# Altium PCB NC1-1B-TESTADAPTER-BASIS.PcbDoc
Units mm, origin at the board's own origin, x right, y up, seen from the top; angles counter-clockwise.
Board outline 100 x 100 mm, 4 copper layers (Top Layer, Mid 1 (GND), Mid 2 (PWR), Bottom Layer), stack 1.586 mm thick; 39 components, 26 nets, 104 pads, 0 vias.
Unrouted connection lines stored in the file: 51.
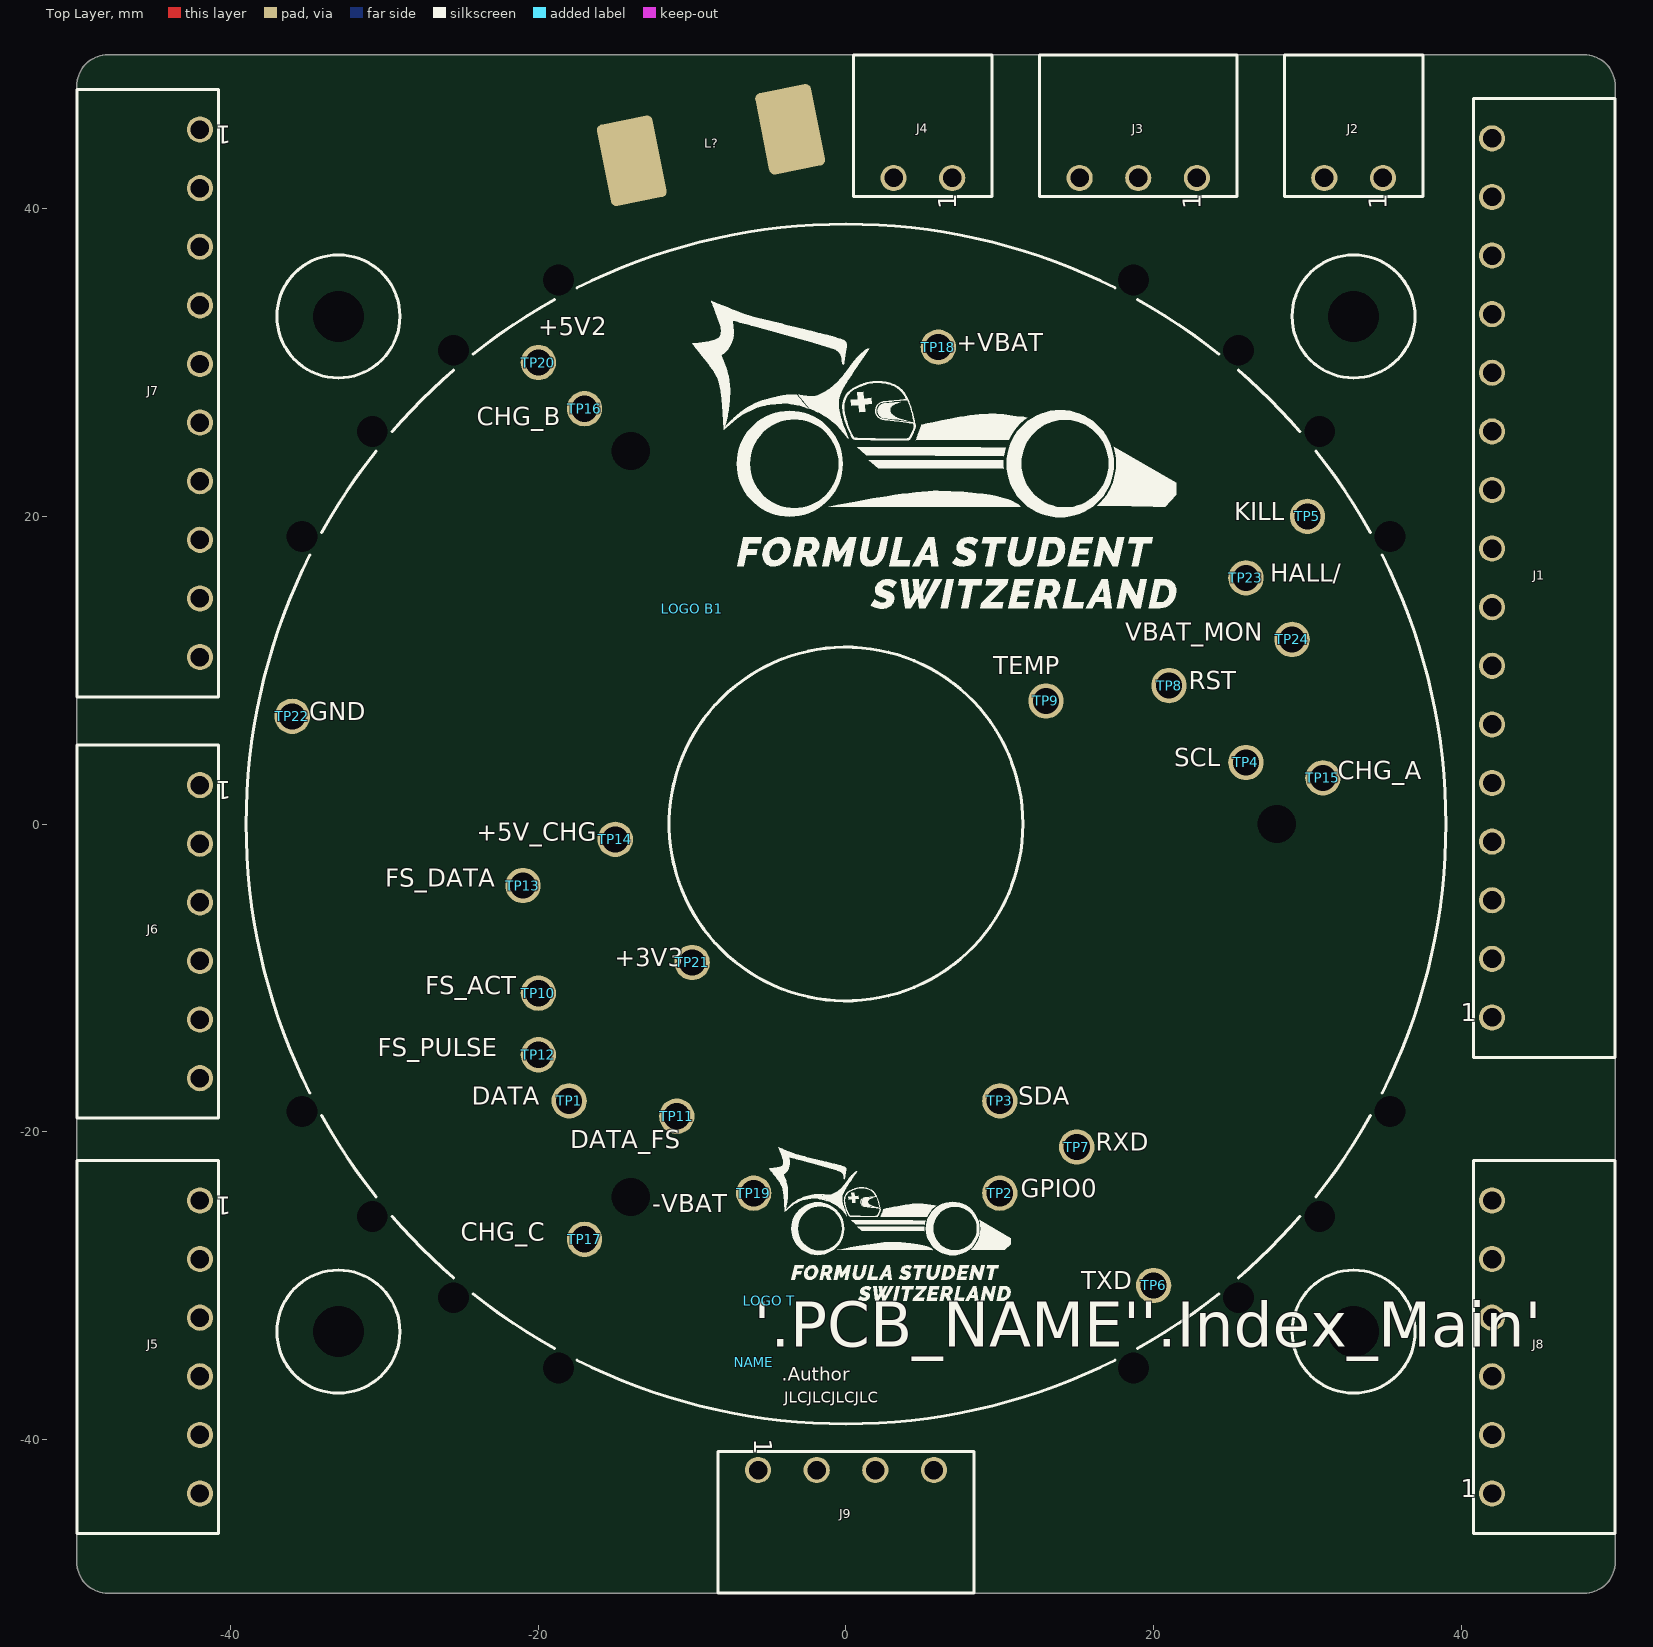
[diagram p0: Top Layer view]
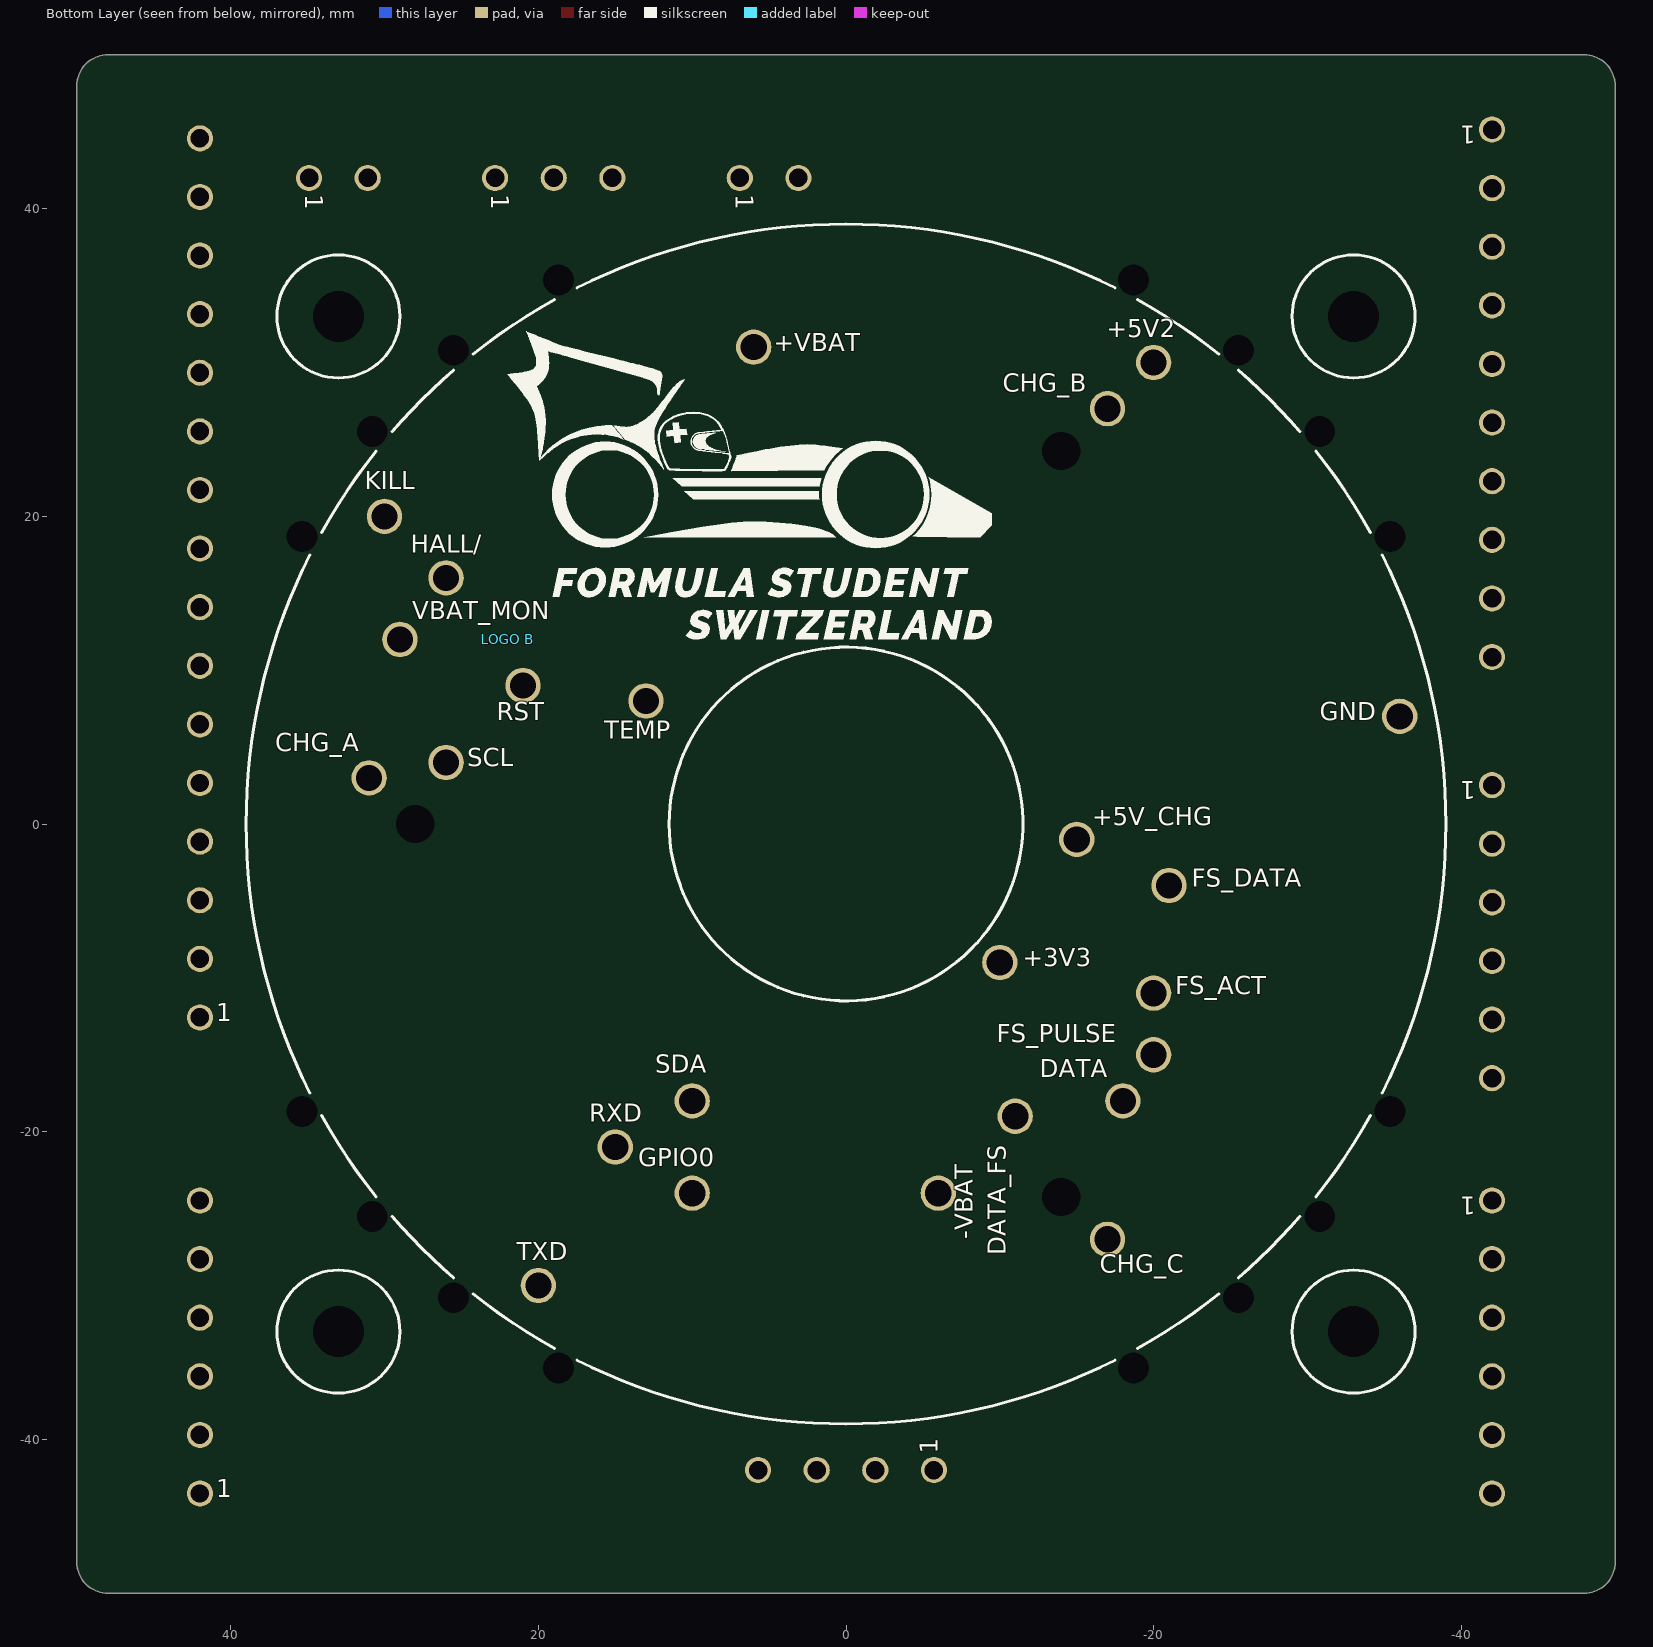
[diagram p1: Bottom Layer view, seen from below]

## Layer stack, top to bottom
Top Solder: solder mask 0.0102, Solder Resist, Dk 3.5
Top Layer: signal copper 0.035
Dielectric 2: prepreg 0.2104, PP-006, Dk 4.1
Mid 1 (GND): signal copper 0.0152
Dielectric 1: dielectric 1.065, FR-4, Dk 4.8
Mid 2 (PWR): signal copper 0.0152
Dielectric 3: prepreg 0.2104, PP-006, Dk 4.1
Bottom Layer: signal copper 0.035
Bottom Solder: solder mask 0.0102, Solder Resist, Dk 3.5

## Board outline
-48,-50 cw(c-48,-48) -50,-48 -50,48 cw(c-48,48) -48,50 48,50 cw(c48,48) 50,48 50,-48 cw(c48,-48) 48,-50

## Design rules (kind name [scope] priority, off if disabled: settings)
BoardOutlineClearance [not (InComponent('MOUSE*'))] p1 off: gap=0.3 ignorepadtopadclearanceinfootprint=FALSE except(0: Arc-SplitContinuation Track-SplitContinuation SMDPad-SplitContinuation THPad-SplitContinuation Via-SplitContinuation Fill-SplitContinuation Poly-SplitContinuation Region-SplitContinuation Text-SplitContinuation)
Clearance Clearance_-VBAT [InNet('-VBAT')] p1: gap=1 ignorepadtopadclearanceinfootprint=FALSE except(0: Arc-Hole Track-Hole SMDPad-Hole THPad-Hole Via-Hole Fill-Hole Poly-Hole Region-Hole Text-Hole)
Clearance [All] p2: gap=0.2 ignorepadtopadclearanceinfootprint=FALSE except(0: Arc-Hole Track-Hole SMDPad-Hole THPad-Hole Via-Hole Fill-Hole Poly-Hole Region-Hole Text-Hole; 0.15: Arc-Arc Arc-Track Arc-SMDPad Arc-THPad Arc-Via Arc-Text Track-Track Track-SMDPad Track-THPad Track-Via Track-Text SMDPad-SMDPad SMDPad-THPad SMDPad-Via SMDPad-Text THPad-THPad THPad-Via THPad-Text Via-Via Via-Text Text-Text)
ComponentClearance ComponentClearance_ESP-01S [All] p1: gap=0.254 collisioncheckmode=3 verticalgap=0.254 showdistances=FALSE
ComponentClearance ComponentClearance_Enclosure [isfree] p2: gap=0 collisioncheckmode=3 verticalgap=0 showdistances=FALSE
ComponentClearance [All] p3: gap=0.25 collisioncheckmode=3 verticalgap=0.25 showdistances=FALSE
Height [All] p1: minheight=0 maxheight=100 prefheight=12.7
HoleSize [All] p1: absolutevalues=TRUE maxlimit=27 minlimit=0.3 maxpercent=80.000 minpercent=20.000
HoleToHoleClearance [All] p1: gap=0.3 allowstackedmicrovias=TRUE
MinimumSolderMaskSliver [All] p1: minsoldermaskwidth=0.1
PolygonConnect [All] p1: thpad.connectstyle=Relief thpad.reliefconductorwidth=0.2 thpad.reliefentries=4 thpad.polygonreliefangle="90 Angle" thpad.airgapwidth=0.2 smdpad.connectstyle=Relief smdpad.reliefconductorwidth=0.2 smdpad.reliefentries=4 smdpad.polygonreliefangle="90 Angle" smdpad.airgapwidth=0.2 via.connectstyle=Direct via.reliefconductorwidth=0.254 via.reliefentries=4 via.polygonreliefangle="90 Angle" via.airgapwidth=0.254
RoutingVias [All] p1: holewidth=0.35 width=0.7 viastyle="Through Hole" minholewidth=0.35 minwidth=0.7 maxholewidth=5 maxwidth=6
SilkToSilkClearance [All] p1: silktosilkclearance=0.1
SilkToSolderMaskClearance [IsPad] p1: minsilkscreentomaskgap=0.1 clearancetoexposedcopper=TRUE
SolderMaskExpansion "SolderMaskExpansion Via" [IsVia] p1: expansion=0.1 istentingtop=TRUE
SolderMaskExpansion [All] p2: expansion=0.05 istentingtop=FALSE
UnRoutedNet [All] p1: checkbadconnections=TRUE
Width [All] p1: maxlimit=5 minlimit=0.15 preferedwidth=0.2 minimp=50.000000 maximp=50.000000 favimp=50.000000
22 further rules are at their usual default settings.

## Classes and differential pairs
component class NC1-1-TESTADAPTER-Top: J1 J2 J3 J4 J5 J6 J7 J8 J9 L? TP1 TP2 TP3 TP4 TP5 TP6 TP7 TP8 TP9 TP10 TP11 TP12 TP13 TP14 TP15 TP16 TP17 TP18 TP19 TP20 TP21 TP22 TP23 TP24

## Components (designator, comment, footprint, x,y, rotation, side; value= is the part's Value field where it differs from the comment)
J1 "MC1.5/16-G-3.81" MC1.5/16-G-3.81 42,16 r90 top
J2 "MC1.5/2-G-3.81" MC1.5/2-G-3.81 33,42 r180 top
J3 "MC1.5/3-G-3.81" MC1.5/3-G-3.81 19,42 r180 top
J4 "MC1.5/2-G-3.81" MC1.5/2-G-3.81 5,42 r180 top
J5 "MC1.5/6-G-3.81" MC1.5/6-G-3.81 -42,-34 r270 top
J6 "MC1.5/6-G-3.81" MC1.5/6-G-3.81 -42,-7 r270 top
J7 "MC1.5/10-G-3.81" MC1.5/10-G-3.81 -42,28 r270 top
J8 "MC1.5/6-G-3.81" MC1.5/6-G-3.81 42,-34 r90 top
J9 "MC1.5/4-G-3.81" MC1.5/4-G-3.81 0,-42 r0 top
L? "220UH/SRR1280" INDM125125X800 -8.779,44.135 r191.25 top value=220UH
"LOGO B" "Comment" FSCH-LOGO-20MM 22,12 r180 bottom
"LOGO B1" "Comment" FSCH-LOGO-20MM -10,14 r0 top
"LOGO T" "Comment" FSCH-LOGO-10MM -5,-31 r0 top
NAME "Comment" PCB-NAME -6,-35 r0 top
TP1 "SPRING-PROBE-SLEEVE-25" TP_SPRING_PROBE_S25-512 -18,-18 r0 top
TP2 "SPRING-PROBE-SLEEVE-25" TP_SPRING_PROBE_S25-512 10,-24 r0 top
TP3 "SPRING-PROBE-SLEEVE-25" TP_SPRING_PROBE_S25-512 10,-18 r0 top
TP4 "SPRING-PROBE-SLEEVE-25" TP_SPRING_PROBE_S25-512 26,4 r0 top
TP5 "SPRING-PROBE-SLEEVE-25" TP_SPRING_PROBE_S25-512 30,20 r0 top
TP6 "SPRING-PROBE-SLEEVE-25" TP_SPRING_PROBE_S25-512 20,-30 r0 top
TP7 "SPRING-PROBE-SLEEVE-25" TP_SPRING_PROBE_S25-512 15,-21 r0 top
TP8 "SPRING-PROBE-SLEEVE-25" TP_SPRING_PROBE_S25-512 21,9 r0 top
TP9 "SPRING-PROBE-SLEEVE-25" TP_SPRING_PROBE_S25-512 13,8 r0 top
TP10 "SPRING-PROBE-SLEEVE-25" TP_SPRING_PROBE_S25-512 -20,-11 r0 top
TP11 "SPRING-PROBE-SLEEVE-25" TP_SPRING_PROBE_S25-512 -11,-19 r0 top
TP12 "SPRING-PROBE-SLEEVE-25" TP_SPRING_PROBE_S25-512 -20,-15 r0 top
TP13 "SPRING-PROBE-SLEEVE-25" TP_SPRING_PROBE_S25-512 -21,-4 r0 top
TP14 "SPRING-PROBE-SLEEVE-25" TP_SPRING_PROBE_S25-512 -15,-1 r0 top
TP15 "SPRING-PROBE-SLEEVE-25" TP_SPRING_PROBE_S25-512 31,3 r0 top
TP16 "SPRING-PROBE-SLEEVE-25" TP_SPRING_PROBE_S25-512 -17,27 r0 top
TP17 "SPRING-PROBE-SLEEVE-25" TP_SPRING_PROBE_S25-512 -17,-27 r0 top
TP18 "SPRING-PROBE-SLEEVE-25" TP_SPRING_PROBE_S25-512 6,31 r0 top
TP19 "SPRING-PROBE-SLEEVE-25" TP_SPRING_PROBE_S25-512 -6,-24 r0 top
TP20 "SPRING-PROBE-SLEEVE-25" TP_SPRING_PROBE_S25-512 -20,30 r0 top
TP21 "SPRING-PROBE-SLEEVE-25" TP_SPRING_PROBE_S25-512 -10,-9 r0 top
TP22 "SPRING-PROBE-SLEEVE-25" TP_SPRING_PROBE_S25-512 -36,7 r0 top
TP23 "SPRING-PROBE-SLEEVE-25" TP_SPRING_PROBE_S25-512 26,16 r0 top
TP24 "SPRING-PROBE-SLEEVE-25" TP_SPRING_PROBE_S25-512 29,12 r0 top
? "Comment" JLC-ORDER 0,-36 r0 top

## Footprints (in the part's own frame and the unit in brackets; to place one, negate y for a bottom-side part, rotate by r counter-clockwise, add the part's x,y. Pads: shape width x height; smd on the part's side, far side on the other; paste and mask are expansions set on the pad)
FSCH-LOGO-10MM [mm]
  silkscreen extent 0,0 15.7,9.99, body extent 0,0 15.7,9.99, height 0.01
FSCH-LOGO-20MM [mm]
  silkscreen extent 0,0 31.48,20.02, body extent 0,0 31.48,20.02, height 0.01
INDM125125X800 [mm]
  rrect20% 3.7x5.4 smd: 1(-5.25,0) 2(5.25,0)
  body extent -6.25,-6.21 6.25,6.29, height 8
JLC-ORDER [mm] "Placement of JLCPCB order number"
MC1.5/2-G-3.81 [mm] "Phoenix contact MC 1,5/ 2-G-3,81"
  round 1.7 hole 1.2: 1(-1.905,0) 2(1.905,0)
  silkscreen extent -4.5,-8 4.5,1.2, body extent -4.5,-8 4.5,1.2, height 7.26
MC1.5/3-G-3.81 [mm] "Phoenix contact MC 1,5/ 3-G-3,81"
  round 1.7 hole 1.2: 1(-3.81,0) 2(0,0) 3(3.81,0)
  silkscreen extent -6.41,-8 6.41,1.2, body extent -6.41,-8 6.41,1.2, height 7.26
MC1.5/4-G-3.81 [mm] "Phoenix contact MC 1,5/ 4-G-3,81"
  round 1.7 hole 1.2: 1(-5.715,0) 2(-1.905,0) 3(1.905,0) 4(5.715,0)
  silkscreen extent -8.31,-8 8.31,1.2, body extent -8.31,-8 8.31,1.2, height 7.26
MC1.5/6-G-3.81 [mm] "Phoenix contact MC 1,5/ 6-G-3,81"
  round 1.7 hole 1.2: 1(-9.525,0) 2(-5.715,0) 3(-1.905,0) 4(1.905,0) 5(5.715,0) 6(9.525,0)
  silkscreen extent -12.12,-8 12.12,1.2, body extent -12.12,-8 12.12,1.2, height 7.26
MC1.5/10-G-3.81 [mm] "Phoenix contact MC 1,5/ 10-G-3,81"
  round 1.7 hole 1.2: 1(-17.145,0) 2(-13.335,0) 3(-9.525,0) 4(-5.715,0) 5(-1.905,0) 6(1.905,0) 7(5.715,0) 8(9.525,0) 9(13.335,0) 10(17.145,0)
  silkscreen extent -19.74,-8 19.74,1.2, body extent -19.74,-8 19.74,1.2, height 7.26
MC1.5/16-G-3.81 [mm] "Phoenix contact MC 1,5/ 16-G-3,81"
  round 1.7 hole 1.2: 1(-28.575,0) 2(-24.765,0) 3(-20.955,0) 4(-17.145,0) 5(-13.335,0) 6(-9.525,0) 7(-5.715,0) 8(-1.905,0) 9(1.905,0) 10(5.715,0) 11(9.525,0) 12(13.335,0) 13(17.145,0) 14(20.955,0) 15(24.765,0) 16(28.575,0)
  silkscreen extent -31.17,-8 31.17,1.2, body extent -31.17,-8 31.17,1.2, height 7.26
PCB-NAME [mm]
TP_SPRING_PROBE_S25-512 [mm] "Harwin Spring probe sleeve 2.54mm S25-512"
  round 2.3 hole 1.7: 1(0,0)
  body extent -0.92,-0.92 0.92,0.92, height 5.5

## Part data
J1: "Phoenix contact MC 1,5/ 16-G-3,81", Manufacturer=Phoenix, Manufacturer Part Number 1=1803413, Supplier Part Number 1=277-1220-ND, HelpURL=https://www.phoenixcontact.com/en-us/products/pcb-header-mc-1516-g-381-1803413?type=pdf, Manufacturer 1=Phoenix, Part Number=MC1.5/16-G-3.81, Supplier 1=Digi-Key
J2 J4: "Phoenix contact MC 1,5/ 2-G-3,81", Manufacturer=Phoenix, Manufacturer Part Number 1=1803277, Supplier Part Number 1=277-1206-ND, HelpURL=https://www.phoenixcontact.com/en-us/products/pcb-header-mc-15-2-g-381-1803277?type=pdf, Manufacturer 1=Phoenix, Part Number=MC1.5/2-G-3.81, Supplier 1=Digi-Key
J3: "Phoenix contact MC 1,5/ 3-G-3,81", Manufacturer=Phoenix, Manufacturer Part Number 1=1803280, Supplier Part Number 1=277-1207-ND, HelpURL=https://www.phoenixcontact.com/en-us/products/pcb-header-mc-15-3-g-381-1803280?type=pdf, Manufacturer 1=Phoenix, Part Number=MC1.5/3-G-3.81, Supplier 1=Digi-Key
J5 J6 J8: "Phoenix contact MC 1,5/ 6-G-3,81", Manufacturer=Phoenix, Manufacturer Part Number 1=1803316, Supplier Part Number 1=277-1210-ND, HelpURL=https://www.phoenixcontact.com/en-us/products/pcb-header-mc-15-6-g-381-1803316?type=pdf, Manufacturer 1=Phoenix, Part Number=MC1.5/6-G-3.81, Supplier 1=Digi-Key
J7: "Phoenix contact MC 1,5/ 10-G-3,81", Manufacturer=Phoenix, Manufacturer Part Number 1=1803358, Supplier Part Number 1=277-1214-ND, HelpURL=https://www.phoenixcontact.com/en-us/products/pcb-header-mc-1510-g-381-1803358?type=pdf, Manufacturer 1=Phoenix, Part Number=MC1.5/10-G-3.81, Supplier 1=Digi-Key
J9: "Phoenix contact MC 1,5/ 4-G-3,81", Manufacturer=Phoenix, Manufacturer Part Number 1=1803293, Supplier Part Number 1=277-1208-ND, HelpURL=https://www.phoenixcontact.com/en-us/products/pcb-header-mc-15-4-g-381-1803293?type=pdf, Manufacturer 1=Phoenix, Part Number=MC1.5/4-G-3.81, Supplier 1=Digi-Key
L?: "FIXED IND 220UH 1.6A 400MOHM SMD", Absolute Value=0.00022, Manufacturer="Buorns Inc", Manufacturer 3=XR, Manufacturer Part Number 1=SRR1280-221K, Manufacturer Part Number 3=XRRH129-221M, Package=12.5x12.5mm, Supplier Part Number 1=SRR1280-221KLCT-ND, HelpURL=https://www.bourns.com/docs/Product-Datasheets/SRR1280.pdf, Manufacturer 1="Buorns Inc", Part Number=220UH/SRR1280, Supplier 1=Digi-Key, Supplier 3=LCSC, Supplier Part Number 3=C5339683
TP1 TP2 TP3 TP4 TP5 TP6 TP7 TP8 TP9 TP10 TP11 TP12 TP13 TP14 TP15 TP16 TP17 TP18 TP19 TP20 TP21 TP22 TP23 TP24: Manufacturer=Harwin, Manufacturer Part Number 1=S25-512, Supplier Part Number 1=952-2294-ND, HelpURL=https://cdn.harwin.com/pdfs/S25-XX2.pdf, Manufacturer 1=Harwin, Part Number=SPRING-PROBE-SLEEVE-25, Supplier 1=Digi-Key

## Free pads (board coordinates)
  round 0 hole 2 unplated: M(-35.367,-18.686) M(-35.367,18.686) M(-30.798,-25.524) M(-30.798,25.524) M(-25.524,-30.798) M(-25.524,30.798) M(-18.686,-35.367) M(-18.686,35.367) M(18.686,-35.367) M(18.686,35.367) M(25.524,-30.798) M(25.524,30.798) M(30.798,-25.524) M(30.798,25.524) M(35.367,-18.686) M(35.367,18.686)
  round 0 hole 3.3 unplated: M(-33,-33) M(-33,33) M(33,-33) M(33,33)
  round 0 hole 2.5 unplated: M(-14,-24.249) M(-14,24.249) M(28,0)

## Nets (pads, with @x,y where several pads share a name; then routed paths per layer and width w, separated by ;. In a path a pad name is that pad's centre, name@x,y a point inside that pad or via, vN(x,y) a via of type N, cw(c..) or ccw(c..) an arc to the next point about the centre after c; other vN are vias at no path point)
+3V3: J1.13 J8.1 TP21.1
+5V2: J1.11 TP20.1
+5V_CHG: J1.5 TP14.1
+VBAT: J1.15 J2.1 TP18.1
-VBAT: J1.16 J2.2 TP19.1
CHG_A: J3.1 TP15.1
CHG_B: J3.2 TP16.1
CHG_C: J3.3 TP17.1
DATA: J6.1 J7.1 TP1.1
DATA_FS: J5.1 J6.5 J7.3 TP11.1
FS_ACT/: J1.3 TP10.1
FS_DATA: J5.5 TP13.1
FS_PULSE: J5.3 TP12.1
GND: J1.2 J1.4 J1.6 J1.8 J1.10 J1.12 J1.14 J5.2 J5.4 J5.6 J6.2 J6.4 J6.6 J7.2 J7.4 J7.6 J7.8 J7.10 J8.5 TP22.1
GPIO0: J7.9 J8.2 TP2.1
HALL/: J1.7 J7.5 TP23.1
KILL: J6.3 TP5.1
NetJ4_1: J4.1 L?.1
NetJ4_2: J4.2 L?.2
RST: J7.7 J8.6 TP8.1
RXD: J8.4 TP7.1
SCL: TP4.1
SDA: TP3.1
TEMP: J1.1 TP9.1
TXD: J8.3 TP6.1
VBAT_MON: J1.9 TP24.1
pads on no net: J9.1 J9.2 J9.3 J9.4

## Silkscreen, mask and mechanical layers (free items; w line width, h text height)
Top Overlay:
  circle w0.2: c0,0 r11.5
  circle w0.2: c-33,-33 r4
  circle w0.2: c33,-33 r4
  circle w0.2: c33,33 r4
  circle w0.2: c-33,33 r4
  lines w0.2: -34.857,-17.493 cw(c0,0) -34.857,17.493 ; -34.094,-18.937 ccw(c0,0) -30.543,-24.251 ; -34.094,18.937 cw(c0,0) -30.543,24.251 ; -29.501,-25.509 ccw(c0,0) -25.509,-29.501 ; -29.501,25.509 cw(c0,0) -25.509,29.501 ; -24.251,-30.543 ccw(c0,0) -18.937,-34.094 ; -24.251,30.543 cw(c0,0) -18.937,34.094 ; -17.493,-34.857 ccw(c0,0) 17.493,-34.857 ; -17.493,34.857 cw(c0,0) 17.493,34.857 ; 18.937,-34.094 ccw(c0,0) 24.251,-30.543 ; 18.937,34.094 cw(c0,0) 24.251,30.543 ; 25.509,-29.501 ccw(c0,0) 29.501,-25.509 ; 25.509,29.501 cw(c0,0) 29.501,25.509 ; 30.543,-24.251 ccw(c0,0) 34.094,-18.937 ; 30.543,24.251 cw(c0,0) 34.094,18.937 ; 34.857,-17.493 ccw(c0,0) 34.857,17.493
  text "+5V2" at -20.02,31.368 h2
  text "+VBAT" at 7.206,30.359 h2
  text "CHG_B" at -23.992,25.526 h2
  text "KILL" at 25.255,19.359 h2
  text "HALL/" at 27.584,15.359 h2
  text "VBAT_MON" at 18.152,11.526 h2
  text "TEMP" at 9.572,9.359 h2
  text "RST" at 22.298,8.359 h2
  text "GND" at -34.894,6.359 h2
  text "SCL" at 21.331,3.359 h2
  text "CHG_A" at 31.96,2.526 h2
  text "+5V_CHG" at -24.001,-1.474 h2
  text "FS_DATA" at -29.958,-4.474 h2
  text "+3V3" at -15.027,-9.632 h2
  text "FS_ACT" at -27.341,-11.474 h2
  text "FS_PULSE" at -30.457,-15.474 h2
  text "DATA" at -24.319,-18.641 h2
  text "SDA" at 11.199,-18.641 h2
  text "DATA_FS" at -17.913,-21.474 h2
  text "RXD" at 16.228,-21.641 h2
  text "GPIO0" at 11.353,-24.641 h2
  text "-VBAT" at -12.59,-25.641 h2
  text "CHG_C" at -25.053,-27.474 h2
  text "TXD" at 15.278,-30.641 h2
  text ".Author" at -4.184,-36.48 h1.5
Bottom Overlay:
  circle w0.2: c0,0 r11.5
  circle w0.2: c-33,33 r4
  circle w0.2: c33,33 r4
  circle w0.2: c33,-33 r4
  circle w0.2: c-33,-33 r4
  lines w0.2: -34.857,-17.493 cw(c0,0) -34.857,17.493 ; -34.094,-18.937 ccw(c0,0) -30.543,-24.251 ; -34.094,18.937 cw(c0,0) -30.543,24.251 ; -29.501,-25.509 ccw(c0,0) -25.509,-29.501 ; -29.501,25.509 cw(c0,0) -25.509,29.501 ; -24.251,-30.543 ccw(c0,0) -18.937,-34.094 ; -24.251,30.543 cw(c0,0) -18.937,34.094 ; -17.493,-34.857 ccw(c0,0) 17.493,-34.857 ; -17.493,34.857 cw(c0,0) 17.493,34.857 ; 18.937,-34.094 ccw(c0,0) 24.251,-30.543 ; 18.937,34.094 cw(c0,0) 24.251,30.543 ; 25.509,-29.501 ccw(c0,0) 29.501,-25.509 ; 25.509,29.501 cw(c0,0) 29.501,25.509 ; 30.543,-24.251 ccw(c0,0) 34.094,-18.937 ; 30.543,24.251 cw(c0,0) 34.094,18.937 ; 34.857,-17.493 ccw(c0,0) 34.857,17.493
  text "+5V2" at -16.96,31.268 h2
  text "+VBAT" at 4.7,30.359 h2
  text "CHG_B" at -10.2,27.726 h2
  text "KILL" at 31.29,21.359 h2
  text "HALL/" at 28.3,17.259 h2
  text "VBAT_MON" at 28.198,12.926 h2
  text "GND" at -30.812,6.359 h2
  text "RST" at 22.703,6.359 h2
  text "TEMP" at 15.7,5.159 h2
  text "CHG_A" at 37.1,4.326 h2
  text "SCL" at 24.639,3.359 h2
  text "+5V_CHG" at -16,-0.474 h2
  text "FS_DATA" at -22.484,-4.474 h2
  text "+3V3" at -11.5,-9.632 h2
  text "FS_ACT" at -21.4,-11.474 h2
  text "FS_PULSE" at -9.786,-14.574 h2
  text "SDA" at 12.395,-16.572 h2
  text "DATA" at -12.6,-16.841 h2
  text "RXD" at 16.7,-19.741 h2
  text "GPIO0" at 13.5,-22.641 h2
  text "-VBAT" at -8.641,-27 h2 r270
  text "DATA_FS" at -10.774,-28.027 h2 r270
  text "TXD" at 21.4,-28.741 h2
  text "CHG_C" at -16.5,-29.574 h2
Board:
  the board outline again, w0.1

## Text inside footprints (layer, text, board x,y; h text height)
J1: Top Overlay "1" at 39.964,-13.218 h2; Bottom Overlay "1" at 40.936,-13.218 h2
J2: Top Overlay "1" at 35.548,39.964 h2 r90; Bottom Overlay "1" at 35.548,40.936 h2 r90
J3: Top Overlay "1" at 23.453,39.964 h2 r90; Bottom Overlay "1" at 23.453,40.936 h2 r90
J4: Top Overlay "1" at 7.548,39.964 h2 r90; Bottom Overlay "1" at 7.548,40.936 h2 r90
J5: Top Overlay "1" at -39.964,-23.832 h2 r180; Bottom Overlay "1" at -40.936,-23.832 h2 r180
J6: Top Overlay "1" at -39.964,3.168 h2 r180; Bottom Overlay "1" at -40.936,3.168 h2 r180
J7: Top Overlay "1" at -39.964,45.788 h2 r180; Bottom Overlay "1" at -40.936,45.788 h2 r180
J8: Top Overlay "1" at 39.964,-44.168 h2; Bottom Overlay "1" at 40.936,-44.168 h2
J9: Top Overlay "1" at -6.358,-39.964 h2 r270; Bottom Overlay "1" at -6.358,-40.936 h2 r270
?: Top Overlay "JLCJLCJLCJLC" at -4.019,-37.884 h1.2